# Altium PCB PCBINTER_V2_Bottom.PcbDoc
Units mm, origin at the board's own origin, x right, y up, seen from the top; angles counter-clockwise.
Board outline 58 x 48 mm, 2 copper layers (Top Layer, Bottom Layer); 28 components, 28 nets, 80 pads, 16 vias.
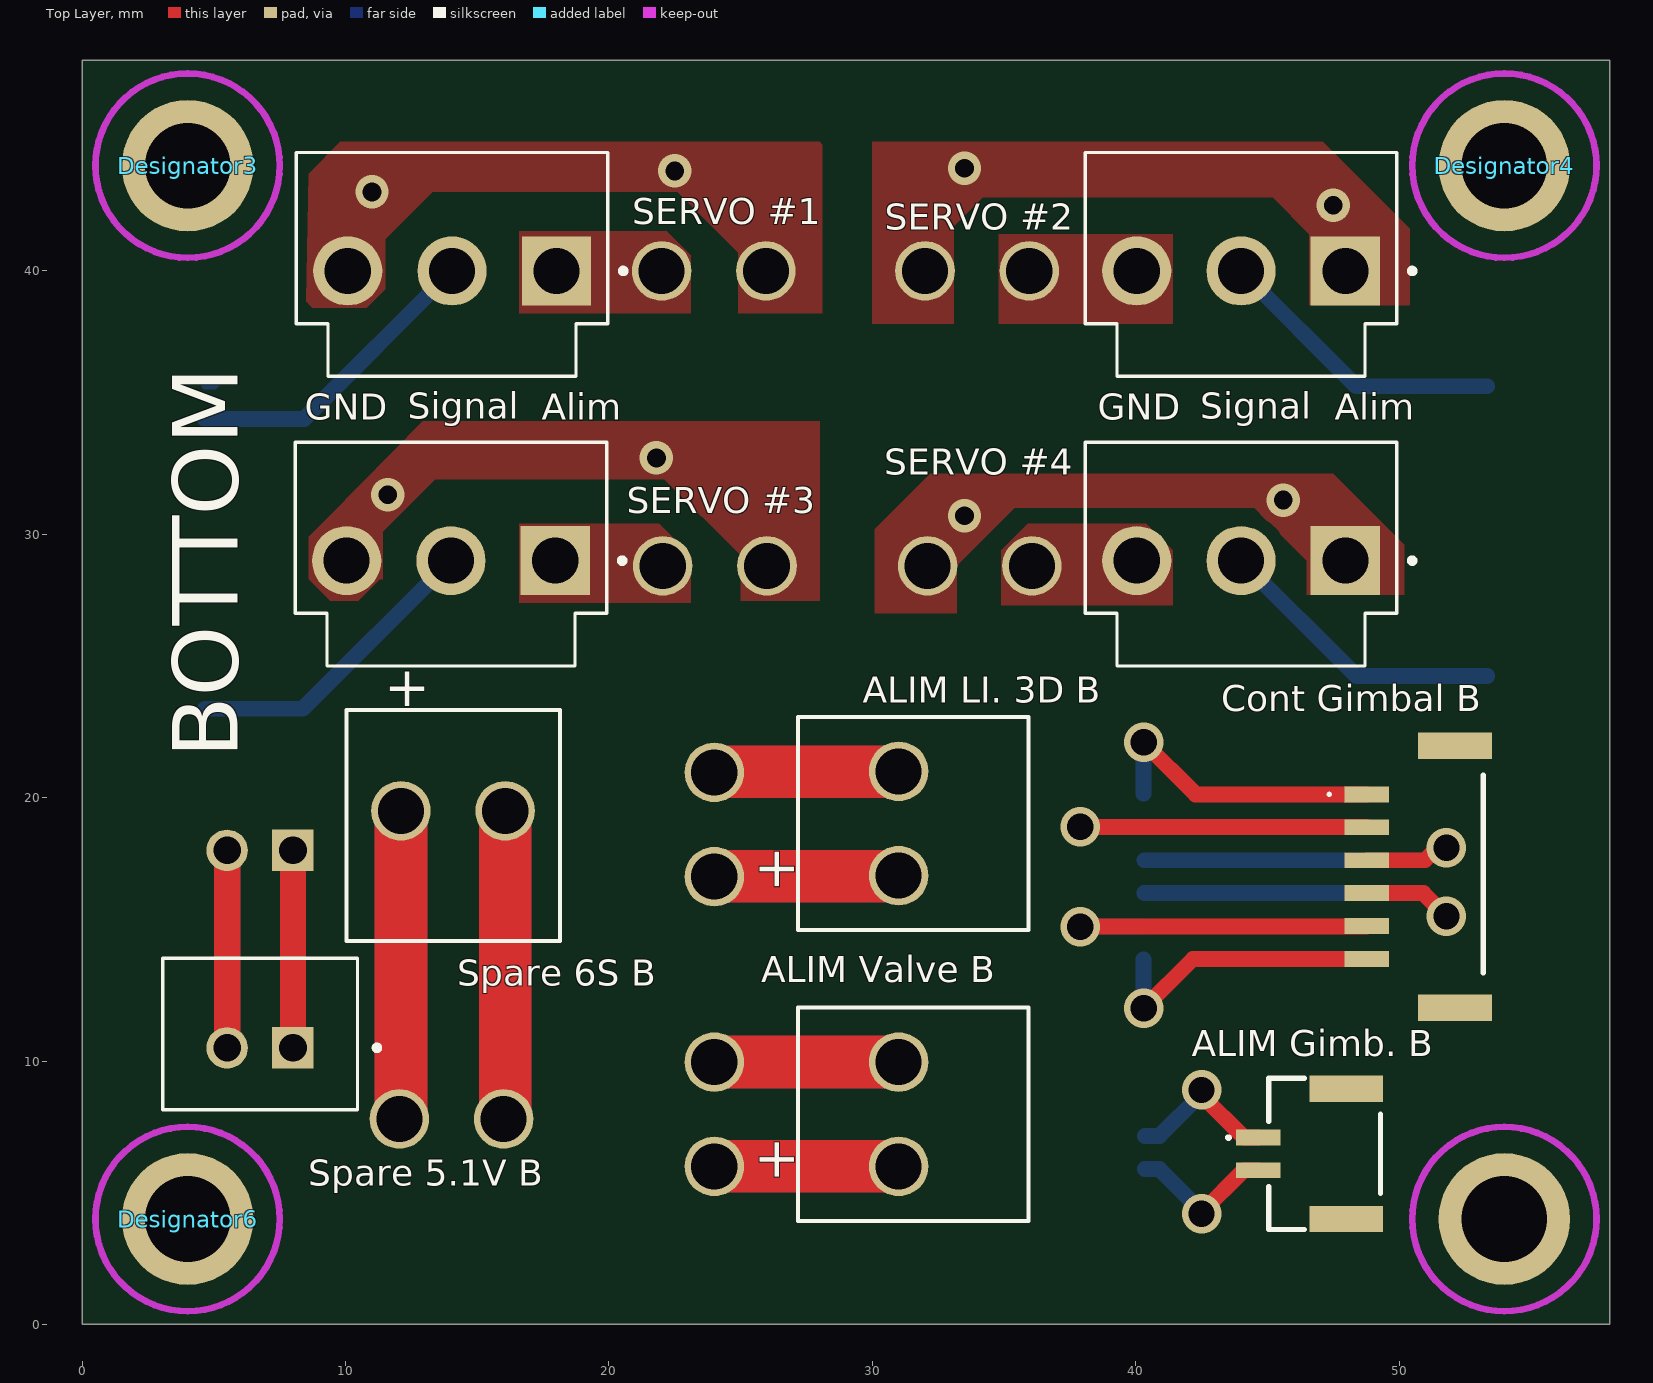
[diagram p0: Top Layer view]
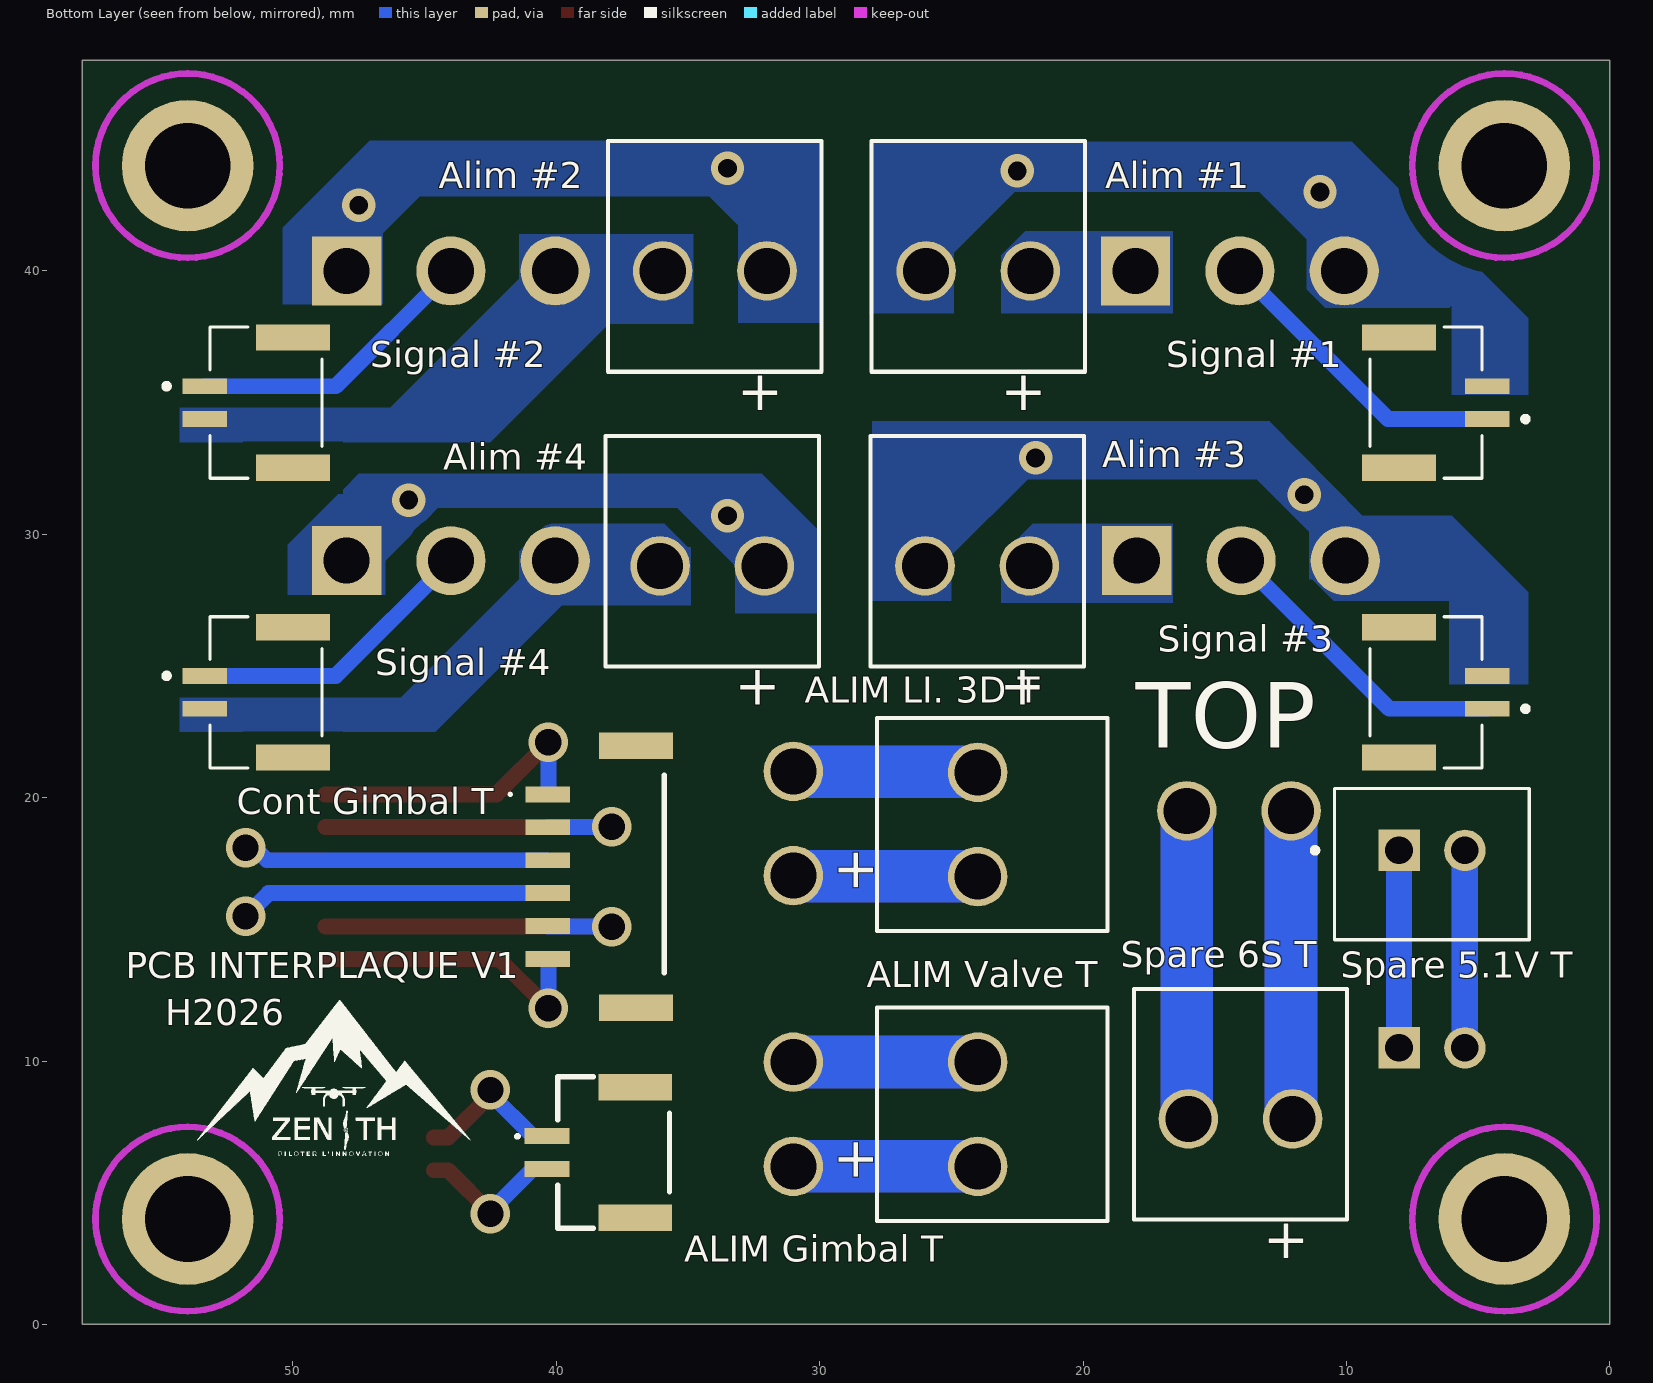
[diagram p1: Bottom Layer view, seen from below]
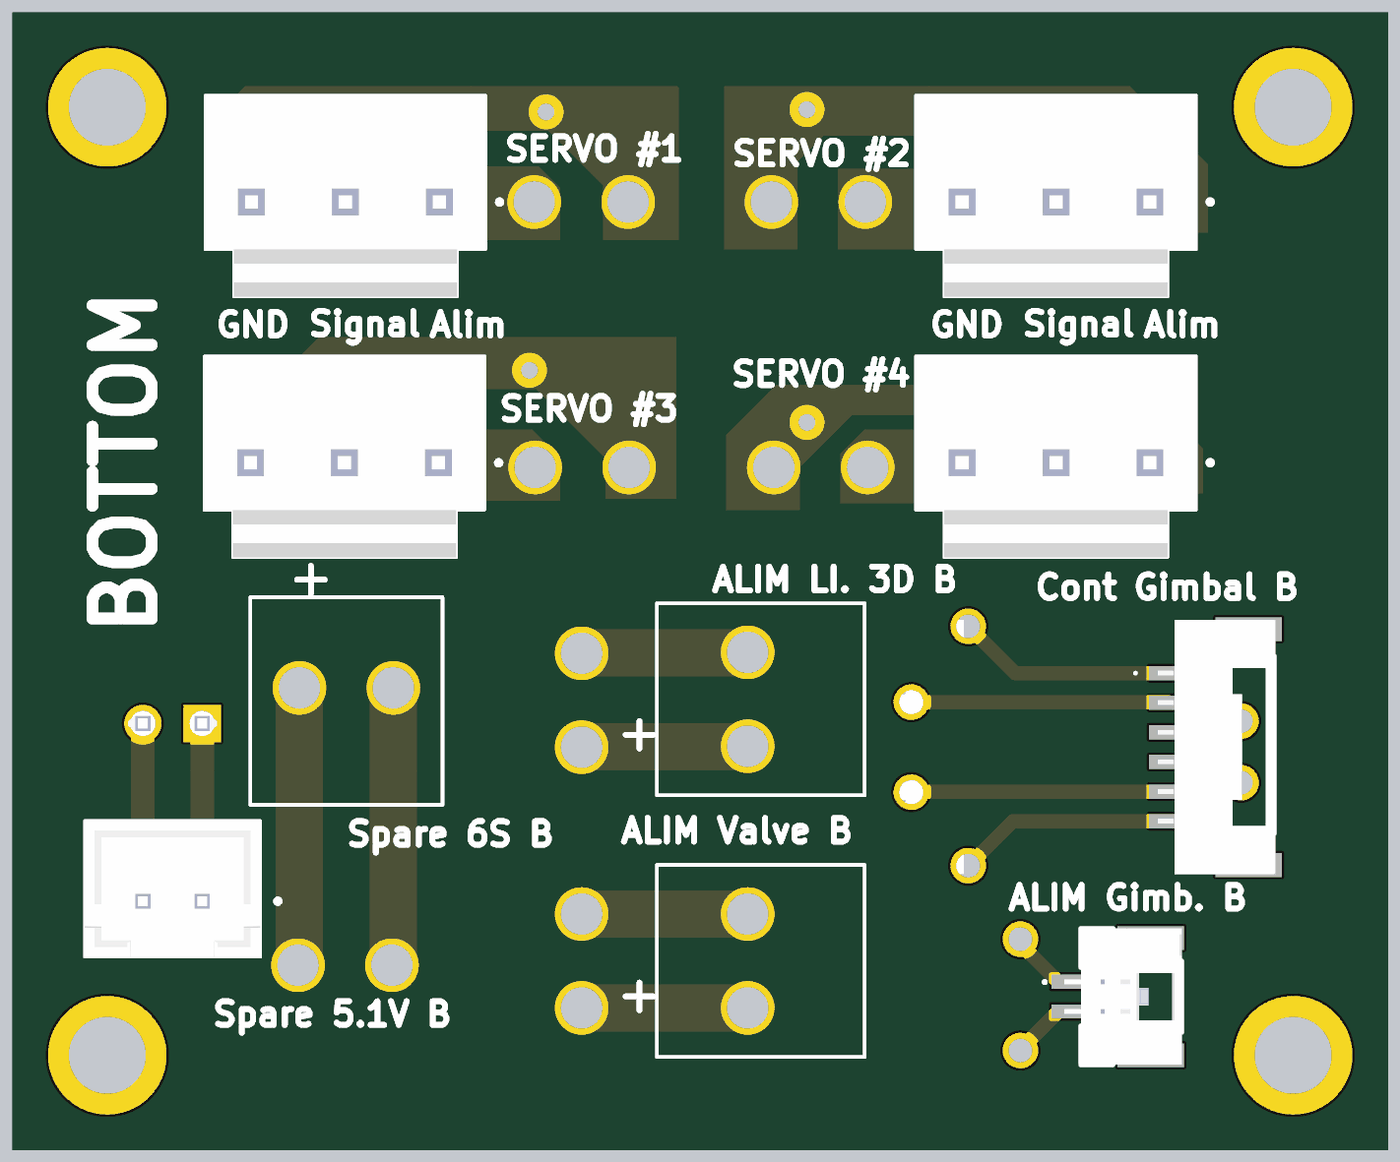
[diagram p2: 3D render of the assembled board from above, using the file's embedded part models]
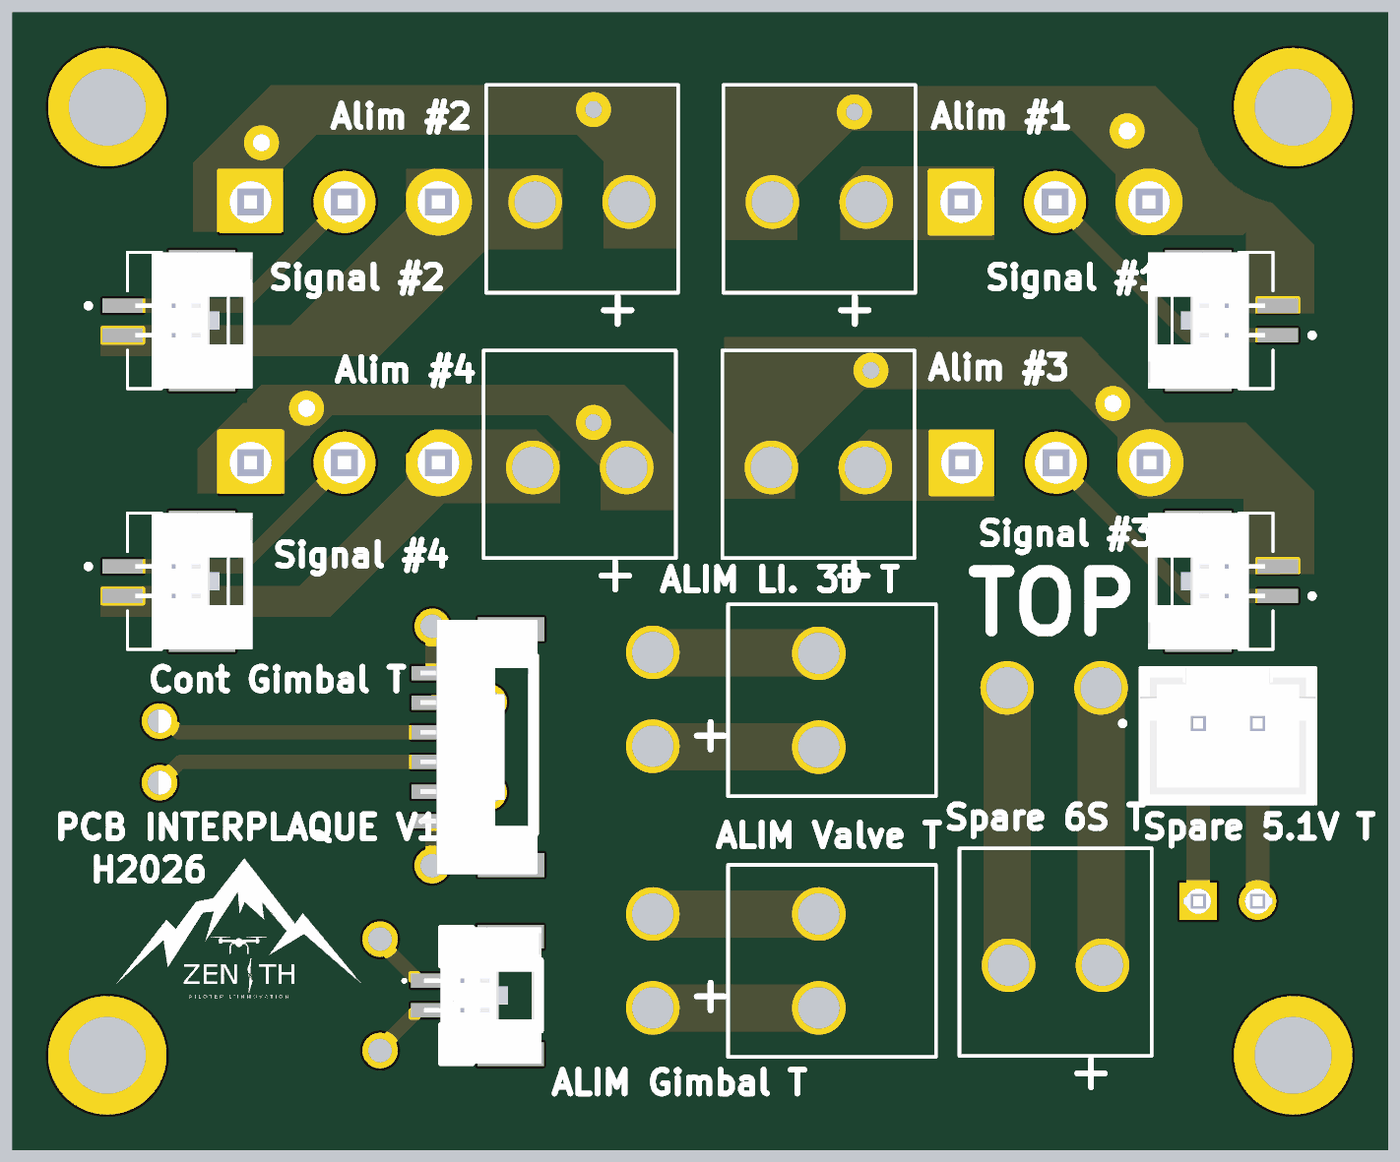
[diagram p3: 3D render of the assembled board from below, using the file's embedded part models]

## Layer stack, top to bottom
Top Solder: solder mask 0.0102, Solder Resist, Dk 3.5
Top Layer: signal copper 0.0356
Dielectric 1: dielectric 0.32, FR-4, Dk 4.8
Bottom Layer: signal copper 0.0356
Bottom Solder: solder mask 0.0102, Solder Resist, Dk 3.5

## Board outline
0,0 0,48 58,48 58,0

## Design rules (kind name [scope] priority, off if disabled: settings)
BoardOutlineClearance [All] p1: gap=0.5 ignorepadtopadclearanceinfootprint=FALSE
Clearance [All] p1: gap=0.5 ignorepadtopadclearanceinfootprint=TRUE
PolygonConnect [All] p1: connectstyle=Direct reliefconductorwidth=0.254 reliefentries=4 polygonreliefangle="90 Angle" airgapwidth=0.254
RoutingVias [All] p1: holewidth=0.711 width=1.27 viastyle="Through Hole" minholewidth=0.711 minwidth=1.27 maxholewidth=0.711 maxwidth=1.27
SolderMaskExpansion [All] p1: expansion=0.102 istentingtop=FALSE
Width [All] p1: maxlimit=0.254 minlimit=0.254 preferedwidth=0.254
30 further rules are at their usual default settings.

## Classes and differential pairs
component class PCBINTER_SCHEMV2_Bottom: "Alim #1" "Alim #2" "Alim #3" "Alim #4" "ALIM Gimb. B" "ALIM Gimbal T" "ALIM LI. 3D B" "ALIM LI. 3D T" "ALIM Valve B" "ALIM Valve T" "Cont Gimbal B" "Cont Gimbal T" "SERVO #1" "SERVO #2" "SERVO #3" "SERVO #4" "Signal #1" "Signal #2" "Signal #3" "Signal #4" "Spare 5.1V B" "Spare 5.1V T" "Spare 6S B" "Spare 6S T"

## Components (designator, comment, footprint, x,y, rotation, side; value= is the part's Value field where it differs from the comment)
"Alim #1" "JST B2P-VH" CONN_B2P-VH_JST 22,40 r0 bottom
"Alim #2" "JST B2P-VH" CONN_B2P-VH_JST 32,40 r0 bottom
"Alim #3" "JST B2P-VH" CONN_B2P-VH_JST 22.04,28.8 r0 bottom
"Alim #4" "JST B2P-VH" CONN_B2P-VH_JST 32.1,28.8 r0 bottom
"ALIM Gimb. B" "JST GH 2 pin" BM02B-GHS-TBT_1 44.65,6.475 r90 top (schematic designator "ALIM Gimbal B")
"ALIM Gimbal T" "JST GH 2 pin" BM02B-GHS-TBT_1 40.35,6.525 r90 bottom
"ALIM LI. 3D B" "JST B2P-VH" CONN_B2P-VH_JST 31,17.04 r90 top
"ALIM LI. 3D T" "JST B2P-VH" CONN_B2P-VH_JST 24,17 r90 bottom
"ALIM Valve B" "JST B2P-VH" CONN_B2P-VH_JST 31,6 r90 top
"ALIM Valve T" "JST B2P-VH" CONN_B2P-VH_JST 24,6 r90 bottom
"Cont Gimbal B" "JST GH 6 pin" BM06BGHSTBTLFSN 51,17 r90 top
"Cont Gimbal T" "JST GH 6 pin" BM06BGHSTBTLFSN 38.1,17 r90 bottom
Designator3 "Comment" "MH - Footprint" 4,44 r0 top
Designator4 "Comment" "MH - Footprint" 54,44 r0 top
Designator6 "Comment" "MH - Footprint" 4,4 r0 top
"SERVO #1" "JST B3P-VH" JST_B3P-VH(LF)(SN) 14.04,40 r180 top
"SERVO #2" "JST B3P-VH" JST_B3P-VH(LF)(SN) 44,40 r180 top
"SERVO #3" "JST B3P-VH" JST_B3P-VH(LF)(SN) 14,29 r180 top
"SERVO #4" "JST B3P-VH" JST_B3P-VH(LF)(SN) 44,29 r180 top
"Signal #1" "JST GH 2 pin" JST_BM02B-GHS-TBT(LF)(SN) 8,35 r270 bottom
"Signal #2" "JST GH 2 pin" JST_BM02B-GHS-TBT(LF)(SN) 50,35 r90 bottom
"Signal #3" "JST GH 2 pin" JST_BM02B-GHS-TBT(LF)(SN) 8,24 r270 bottom
"Signal #4" "JST GH 2 pin" JST_BM02B-GHS-TBT(LF)(SN) 50,24 r90 bottom
"Spare 5.1V B" "JST XH 2 pin" JST_B2B-XH-A_(LF)(SN) 6.75,11.025 r0 top
"Spare 5.1V T" "JST XH 2 pin" JST_B2B-XH-A_(LF)(SN) 6.75,17.475 r0 bottom
"Spare 6S B" "JST B2P-VH" CONN_B2P-VH_JST 12.1,19.5 r0 top
"Spare 6S T" "JST B2P-VH" CONN_B2P-VH_JST 12.04,7.8 r0 bottom
? "Comment" "MH - Footprint" 54,4 r0 top

## Footprints (in the part's own frame and the unit in brackets; to place one, negate y for a bottom-side part, rotate by r counter-clockwise, add the part's x,y. Pads: shape width x height; smd on the part's side, far side on the other; paste and mask are expansions set on the pad)
BM02B-GHS-TBT_1 [mm]
  rect 0.6x1.7 smd: 1(0.625,0) 2(-0.625,0)
  rect 1x2.8 smd: 3(-2.475,-3.35) 4(2.475,-3.35)
  silkscreen extent -2.88,-4.65 2.88,1.15, body extent -2.88,-4.65 2.88,0.3, height 4.05
BM06BGHSTBTLFSN [mm]
  rect 0.6x1.7 smd: 1(3.125,2.225) 2(1.875,2.225) 3(0.625,2.225) 4(-0.625,2.225) 5(-1.875,2.225) 6(-3.125,2.225)
  rect 1x2.8 smd: MP1(4.975,-1.125) MP2(-4.975,-1.125)
  silkscreen extent -3.65,-2.2 3.85,3.7, body extent -5.37,-2.24 5.38,2.71, height 4.21
CONN_B2P-VH_JST [mil]
  round 89 / inner round 60 / far side round 89 hole 69 paste-99999 mask+0: 1(0,0) 2(155.91,0)
  silkscreen extent -82,-194 237,151
JST_B2B-XH-A_(LF)(SN) [mm]
  rect 1.575x1.575 / inner round 1.575 / far side rect 1.575x1.575 hole 1.05: 1(1.25,-0.525)
  round 1.575 hole 1.05: 2(-1.25,-0.525)
  silkscreen extent -3.7,-2.88 4.54,2.88, body extent -3.7,-2.88 3.7,2.88, height 7
JST_B3P-VH(LF)(SN) [mm]
  rect 2.625x2.625 / inner round 2.625 / far side rect 2.625x2.625 hole 1.75: 1(-3.96,0)
  round 2.625 hole 1.75: 2(0,0) 3(3.96,0)
  silkscreen extent -6.6,-4.5 5.91,4, body extent -5.91,-4.5 5.91,4, height 10.9
JST_BM02B-GHS-TBT(LF)(SN) [mm]
  rect 0.6x1.7 smd: 1(0.625,3.35) 2(-0.625,3.35)
  rect 1x2.8 smd: P1(-2.475,0) P2(2.475,0)
  silkscreen extent -2.88,-1.1 2.88,4.9, body extent -2.88,-2.12 2.88,2.83, height 4.05
"MH - Footprint" [mm]
  round 5 hole 3.25: MH(0,0)
  Keep-Out Layer circle w0.254: c0,0 r3.5

## Part data
"Alim #1" "Alim #2" "Alim #3" "Alim #4" "ALIM LI. 3D B" "ALIM LI. 3D T" "ALIM Valve B" "ALIM Valve T" "Spare 6S B" "Spare 6S T": library part B2P-VHLFSN, "JST VH 2 pin", Manufacturer_Name=JST, Manufacturer_Part_Number=B2P-VH(LF)(SN), Copyright="Copyright (C) 2025 Ultra Librarian. All rights reserved.", RefDes=RefDes, Type=Type
"ALIM Gimb. B" "ALIM Gimbal T": library part BM02B-GHS-TBT_LF__SN__N_, "Connector", Arrow Part Number=BM02B-GHS-TBT(LF)(SN)(N), Manufacturer_Name="JST (JAPAN SOLDERLESS TERMINALS)", Arrow Price/Stock=https://www.arrow.com/en/products/bm02b-ghs-tbt-lf-sn-n/jst-manufacturing?region=nac, Datasheet Link=http://www.jst-mfg.com/product/pdf/eng/eGH.pdf, Manufacturer_Part_Number=BM02B-GHS-TBT(LF)(SN)(N)
"Cont Gimbal B" "Cont Gimbal T": library part BM06B-GHS-TBT_LF__SN_, "Connector", Manufacturer_Name="JST (JAPAN SOLDERLESS TERMINALS)", Manufacturer_Part_Number=BM06B-GHS-TBT(LF)(SN), Mouser Part Number=306-BM06BGHSTBTLFSNN, Datasheet Link=https://datasheet.lcsc.com/szlcsc/2004111131_JST-Sales-America-BM06B-GHS-TBT-LF-SN_C495534.pdf, Height=4.05mm, Mouser Price/Stock=https://www.mouser.co.uk/ProductDetail/JST-Commercial/BM06B-GHS-TBTLFSN?qs=cdbOS8ANM9CObKjnhD04mw%3D%3D
"SERVO #1" "SERVO #2" "SERVO #3" "SERVO #4": library part B3P-VH(LF)(SN), "JST VH 3 PIN", Package=None, Check_prices=https://www.snapeda.com/parts/B3P-VH(LF)(SN)/JST/view-part/?ref=eda, MF="JST Sales", MP=B3P-VH(LF)(SN), SnapEDA_Link=https://www.snapeda.com/parts/B3P-VH(LF)(SN)/JST/view-part/?ref=snap
"Signal #1" "Signal #2" "Signal #3" "Signal #4": library part BM02B-GHS-TBT(LF)(SN), "Connector Header Surface Mount 2 position 0.049 (1.25mm)", Package=None, Check_prices=https://www.snapeda.com/parts/BM02B-GHS-TBT%20(LF)(SN)/JST/view-part/?ref=eda, MF="JST Sales", MP="BM02B-GHS-TBT (LF)(SN)", SnapEDA_Link=https://www.snapeda.com/parts/BM02B-GHS-TBT%20(LF)(SN)/JST/view-part/?ref=snap
"Spare 5.1V B" "Spare 5.1V T": library part B2B-XH-A_(LF)(SN), "Connector Header Through Hole 2 position 0.098 (2.50mm)", Package=None, Check_prices=https://www.snapeda.com/parts/B2B-XH-A%20(LF)(SN)/JST+Sales+America+Inc./view-part/?ref=eda, MF="JST Sales", MP="B2B-XH-A (LF)(SN)", SnapEDA_Link=https://www.snapeda.com/parts/B2B-XH-A%20(LF)(SN)/JST+Sales+America+Inc./view-part/?ref=snap

## Via types
v1: diameter 1.27, hole 0.711, Top Layer to Bottom Layer, 8 vias
v2: diameter 1.5, hole 1, Top Layer to Bottom Layer, 8 vias

## Nets (pads, with @x,y where several pads share a name; then routed paths per layer and width w, separated by ;. In a path a pad name is that pad's centre, name@x,y a point inside that pad or via, vN(x,y) a via of type N, cw(c..) or ccw(c..) an arc to the next point about the centre after c; other vN are vias at no path point)
"NetAlim #1_1": "Alim #1.1" "SERVO #1.1"
"NetAlim #1_2": "Alim #1.2" "SERVO #1.3" "Signal #1.2" | length 0.6
  Bottom Layer w0.254: 4.65,35.625 5.027,35.625 5.2,35.798
  other v1: 11,43 22.5,43.8
"NetAlim #2_1": "Alim #2.1" "SERVO #2.1"
  other v1: 47.5,42.5 33.5,43.9
"NetAlim #2_2": "Alim #2.2" "SERVO #2.3" "Signal #2.2"
"NetAlim #3_1": "Alim #3.1" "SERVO #3.1"
"NetAlim #3_2": "Alim #3.2" "SERVO #3.3" "Signal #3.2"
  other v1: 11.6,31.5 21.8,32.9
"NetAlim #4_1": "Alim #4.1" "SERVO #4.1"
  other v1: 33.5,30.7 45.6,31.3
"NetAlim #4_2": "Alim #4.2" "SERVO #4.3" "Signal #4.2"
"NetALIM Gimbal B_1": "ALIM Gimb. B.1" "ALIM Gimbal T.1" | length 5.8
  Top Layer w0.254: v2@42.5,8.7 v2(42.5,8.9)
  Top Layer w0.6: v2@42.5,8.7 44.1,7.1 44.65,7.1
  Bottom Layer w0.6: 40.35,7.15 40.9,7.15 v2@42.5,8.75
"NetALIM Gimbal B_2": "ALIM Gimb. B.2" "ALIM Gimbal T.2" | length 5.7
  Top Layer w0.254: v2(42.5,4.2) v2@42.5,4.25
  Top Layer w0.6: v2@42.5,4.25 44.1,5.85 44.65,5.85
  Bottom Layer w0.6: 40.35,5.9 40.9,5.9 v2@42.5,4.3
"NetALIM LI. 3D B_1": "ALIM LI. 3D B.1" "ALIM LI. 3D T.1" | length 14
  Top Layer w0.254: 24,17 24.02,17.02 ; 30.98,17.02 31,17.04
  Top Layer w2: 24.02,17.02 30.98,17.02
  Bottom Layer w0.254: 24,17 24.02,17.02 ; 30.98,17.02 31,17.04
  Bottom Layer w2: 24.02,17.02 30.98,17.02
"NetALIM LI. 3D B_2": "ALIM LI. 3D B.2" "ALIM LI. 3D T.2" | length 14
  Top Layer w0.254: 24,20.96 24.02,20.98 ; 30.98,20.98 31,21
  Top Layer w2: 24.02,20.98 30.98,20.98
  Bottom Layer w0.254: 24,20.96 24.02,20.98 ; 30.98,20.98 31,21
  Bottom Layer w2: 24.02,20.98 30.98,20.98
"NetALIM Valve B_1": "ALIM Valve B.1" "ALIM Valve T.1" | length 14
  Top Layer w2: 24,6 31,6
  Bottom Layer w2: 24,6 31,6
"NetALIM Valve B_2": "ALIM Valve B.2" "ALIM Valve T.2" | length 14
  Top Layer w2: 24,9.96 31,9.96
  Bottom Layer w2: 24,9.96 31,9.96
"NetCont Gimbal B_1": "Cont Gimbal B.1" "Cont Gimbal T.1" | length 11.3
  Top Layer w0.6: v2(40.3,22.1) 42.275,20.125 48.775,20.125
  Bottom Layer w0.254: 40.3,20.15 40.325,20.125
  Bottom Layer w0.6: 40.3,20.15 v2(40.3,22.1)
"NetCont Gimbal B_2": "Cont Gimbal B.2" "Cont Gimbal T.2" | length 13.3
  Top Layer w0.254: v2(37.9,18.9) v2@37.912,18.888 ; 48.762,18.888 48.775,18.875
  Top Layer w0.6: v2@37.912,18.888 48.762,18.888
  Bottom Layer w0.254: 40.312,18.888 40.325,18.875
  Bottom Layer w0.6: v2@37.912,18.888 40.312,18.888
"NetCont Gimbal B_3": "Cont Gimbal B.3" "Cont Gimbal T.3" | length 14.6
  Top Layer w0.254: v2@51.463,18.1 v2(51.8,18.1)
  Top Layer w0.6: 48.775,17.625 50.988,17.625 v2@51.463,18.1
  Bottom Layer w0.6: 40.325,17.625 50.988,17.625 v2@51.463,18.1
"NetCont Gimbal B_4": "Cont Gimbal B.4" "Cont Gimbal T.4" | length 15.2
  Top Layer w0.6: 48.775,16.375 50.925,16.375 v2(51.8,15.5)
  Bottom Layer w0.6: 40.325,16.375 50.925,16.375 v2(51.8,15.5)
"NetCont Gimbal B_5": "Cont Gimbal B.5" "Cont Gimbal T.5" | length 13.3
  Top Layer w0.254: v2(37.9,15.1) v2@37.912,15.112 ; 48.763,15.112 48.775,15.125
  Top Layer w0.6: v2@37.912,15.112 48.763,15.112
  Bottom Layer w0.254: 40.313,15.112 40.325,15.125
  Bottom Layer w0.6: v2@37.912,15.112 40.313,15.112
"NetCont Gimbal B_6": "Cont Gimbal B.6" "Cont Gimbal T.6" | length 11.1
  Top Layer w0.6: v2(40.3,12) 42.175,13.875 48.775,13.875
  Bottom Layer w0.254: 40.3,13.85 40.325,13.875
  Bottom Layer w0.6: v2(40.3,12) 40.3,13.85
"NetSERVO #1_2": "SERVO #1.2" "Signal #1.1" | length 11.7
  Bottom Layer w0.6: 4.65,34.375 8.415,34.375 14.04,40
"NetSERVO #2_2": "SERVO #2.2" "Signal #2.1" | length 11.2
  Bottom Layer w0.6: 44,40 48.375,35.625 53.35,35.625
"NetSERVO #3_2": "SERVO #3.2" "Signal #3.1" | length 11.7
  Bottom Layer w0.6: 4.65,23.375 8.375,23.375 14,29
"NetSERVO #4_2": "SERVO #4.2" "Signal #4.1" | length 11.2
  Bottom Layer w0.6: 44,29 48.375,24.625 53.35,24.625
"NetSpare 5.1V B_1": "Spare 5.1V B.1" "Spare 5.1V T.1" | length 15
  Top Layer w1: 8,10.5 8,18
  Bottom Layer w1: 8,10.5 8,18
"NetSpare 5.1V B_2": "Spare 5.1V B.2" "Spare 5.1V T.2" | length 15
  Top Layer w1: 5.5,10.5 5.5,18
  Bottom Layer w1: 5.5,10.5 5.5,18
"NetSpare 6S B_1": "Spare 6S B.1" "Spare 6S T.1" | length 23.3
  Top Layer w2: 12.1,7.86 12.09,7.87 12.09,8.034 12.1,8.044 12.1,19.5
  Bottom Layer w2: 12.1,7.86 12.09,7.87 12.09,8.034 12.1,8.044 12.1,19.5
"NetSpare 6S B_2": "Spare 6S B.2" "Spare 6S T.2" | length 23.3
  Top Layer w2: 16.06,7.86 16.05,7.87 16.05,8.034 16.06,8.044 16.06,19.5
  Bottom Layer w2: 16.06,7.86 16.05,7.87 16.05,8.034 16.06,8.044 16.06,19.5
pads on no net: "ALIM Gimb. B.3" "ALIM Gimb. B.4" "ALIM Gimbal T.3" "ALIM Gimbal T.4" "Cont Gimbal B.MP1" "Cont Gimbal B.MP2" "Cont Gimbal T.MP1" "Cont Gimbal T.MP2" "Signal #1.P1" "Signal #1.P2" "Signal #2.P1" "Signal #2.P2" "Signal #3.P1" "Signal #3.P2" "Signal #4.P1" "Signal #4.P2" ?.MH Designator3.MH Designator4.MH Designator6.MH

## Polygon pours and split planes (outlines as drawn)
"NetAlim #4_1" on Bottom Layer "NETALIM_#4_1_L02_P011" (solid, pour order 11): 50.2,27.7 50.2,29.6 47.5,32.3 32.2,32.3 30.1,30.2 30.1,27 33.2,27 33.2,28.8 35.4,31 44.5,31 46.5,29 46.5,27.7
"NetAlim #1_2" on Bottom Layer "NETALIM_#1_2_L02_P015" (solid, pour order 15): 10.8,38.6 11.5,39.3 11.5,41.2 13.3,43 22.6,43 24.9,40.7 24.9,38.4 28.1,38.4 28.1,44.8 28,44.9 9.8,44.9 3.1,38.2 3.1,35.3 6,35.3 6,38.7 6.1,38.6
"NetAlim #2_1" on Bottom Layer "NETALIM_#2_1_L02_P014" (solid, pour order 14): 33.089,38.038 33.089,41.738 34.189,42.838 45.189,42.838 46.589,41.438 46.589,38.738 50.389,38.738 50.389,41.638 47.089,44.938 29.989,44.938 29.989,38.038
"NetAlim #3_1" on Bottom Layer "NETALIM_#3_1_L02_P010" (solid, pour order 10): 16.6,30.4 21.9,30.4 23.1,29.2 23.1,27.4 16.6,27.4
"NetAlim #3_2" on Bottom Layer "NETALIM_#3_2_L02_P009" (solid, pour order 9): 12.925,34.3 28,34.3 28,27.475 25,27.475 25,29.2 22.1,32.1 13.4,32.1 11.4,30.1 11.4,28.3 11.3,28.3 10.475,27.475 6.1,27.475 6.1,24.3 3.1,24.3 3.1,27.8 6,30.7 9.4,30.7
"NetAlim #4_2" on Bottom Layer "NETALIM_#4_2_L02_P007" (solid, pour order 7): 35.9,30.4 35,29.5 34.9,29.5 34.9,27.3 39.8,27.3 44.6,22.5 54.3,22.5 54.3,23.8 45.9,23.8 41.4,28.3 41.4,29.35 40.4,30.35 40.2,30.4
"NetAlim #2_2" on Bottom Layer "NETALIM_#2_2_L02_P003" (solid, pour order 3): 54.3,34.8 54.3,33.5 42.5,33.5 38.1,37.9 38.1,38 39.1,39.1 41.4,39.7 46.3,34.8
"NetAlim #2_2" on Bottom Layer "NETALIM_#2_2_L02_P002" (solid, pour order 2): 41.4,41.4 41.4,38 34.8,38 34.8,41.4
"NetAlim #1_1" on Bottom Layer "NETALIM_#1_1_L02_P001" (solid, pour order 1): 16.6,41.5 22.2,41.5 23.1,40.6 23.1,38.4 16.6,38.4 16.6,41.4
"NetAlim #4_1" on Top Layer "NETALIM_#4_1_L01_P008" (solid, pour order 8): 50.2,27.7 50.2,29.6 47.5,32.3 32.2,32.3 30.1,30.2 30.1,27 33.2,27 33.2,28.8 35.4,31 44.5,31 46.5,29 46.5,27.7
"NetAlim #1_1" on Top Layer "NETALIM_#1_1_L01_P016" (solid, pour order 16): 16.6,41.5 22.2,41.5 23.1,40.6 23.1,38.4 16.6,38.4
"NetAlim #1_2" on Top Layer "NETALIM_#1_2_L01_P000" (solid, pour order 0): 8.45,38.6 8.5,38.65 8.6,43.7 9.8,44.9 28,44.9 28.1,44.8 28.1,38.4 24.9,38.4 24.9,40.7 22.6,43 13.3,43 11.5,41.2 11.5,39.3 10.8,38.6
"NetAlim #2_1" on Top Layer "NETALIM_#2_1_L01_P004" (solid, pour order 4): 33.1,38 33.1,41.7 34.2,42.8 45.2,42.8 46.6,41.4 46.6,38.7 50.4,38.7 50.4,41.6 47.1,44.9 30,44.9 30,38
"NetAlim #2_2" on Top Layer "NETALIM_#2_2_L01_P013" (solid, pour order 13): 34.8,41.4 34.8,38 41.4,38 41.4,41.4
"NetAlim #4_2" on Top Layer "NETALIM_#4_2_L01_P012" (solid, pour order 12): 34.9,27.3 34.9,29.4 35.9,30.4 40.4,30.4 41.4,29.4 41.4,27.3
"NetAlim #3_1" on Top Layer "NETALIM_#3_1_L01_P006" (solid, pour order 6): 16.6,30.4 21.9,30.4 23.1,29.2 23.1,27.4 16.6,27.4
"NetAlim #3_2" on Top Layer "NETALIM_#3_2_L01_P005" (solid, pour order 5): 9.425,27.475 8.6,28.3 8.6,29.9 9.4,30.7 12.925,34.3 28,34.3 28,27.475 25,27.475 25,29.2 22.1,32.1 13.4,32.1 11.4,30.1 11.4,28.3 11.3,28.3 10.475,27.475

## Silkscreen, mask and mechanical layers (free items; w line width, h text height)
Top Overlay:
  text "Signal" at 12.354,34.387 h1
  text "Signal" at 42.454,34.387 h1
  text "GND" at 8.454,34.354 h1
  text "Alim" at 17.454,34.354 h1
  text "GND" at 38.554,34.354 h1
  text "Alim" at 47.554,34.354 h1
  text "BOTTOM" at 5.9,21.5 h2.5 r90
Bottom Overlay:
  drawing of 35 lines, arcs and shapes, not listed
  text "TOP" at 18,21.9 h2.5
  text "PCB INTERPLAQUE V1" at 56.346,13.149 h1
  text "H2026" at 54.846,11.354 h1

## Text inside footprints (layer, text, board x,y; h text height)
"Alim #1": Bottom Overlay "+" at 21.375,36.029 h1.52 r180
"Alim #2": Bottom Overlay "+" at 31.375,36.029 h1.52 r180
"Alim #3": Bottom Overlay "+" at 21.415,24.829 h1.52 r180
"Alim #4": Bottom Overlay "+" at 31.475,24.829 h1.52 r180
"ALIM LI. 3D B": Top Overlay "+" at 27.029,16.415 h1.52 r90
"ALIM LI. 3D T": Bottom Overlay "+" at 27.971,16.375 h1.52 r270
"ALIM Valve B": Top Overlay "+" at 27.029,5.375 h1.52 r90
"ALIM Valve T": Bottom Overlay "+" at 27.971,5.375 h1.52 r270
"Spare 6S B": Top Overlay "+" at 11.475,23.471 h1.52
"Spare 6S T": Bottom Overlay "+" at 11.415,3.829 h1.52 r180